# EAGLE board cansat (EAGLE 9.6.2)

Size 100 x 96.19 mm. Coordinates in mm from the lower left corner, seen from the top.
Outline: 0,0 100,0 100,96.19 0,96.19 0,0
Copper layers (1*16): Top 0.035mm / dielectric 1.5mm / Bottom 0.035mm
Design rules "default": minimum track width 6mil, minimum drill 0.35mm, track to track 6mil, track to pad 6mil, pad to pad 6mil, via to via 6mil, smd to smd 6mil, copper to edge 40mil, drill to drill 6mil, minimum pad ring 10mil, minimum via ring 8mil, stop-mask expansion 4mil, vias tented up to drill 0mil, thermal gap 10mil
Net classes: 1 esp: width 0.254 mm, drill 0.127 mm, clearance 0.025 mm; 2 GND_+12V: width 0.305 mm

## Footprints (pad centres in the part's own frame; a part is rotated, then mirrored left to right if it is on the bottom)
AZ1117CH-3.3TRG1 = smd 1.2 x 2.2: 1 -2.3,-6.2; 2 0,-6.2; 3 2.3,-6.2 | smd 3.5 x 2.2: VOUT 0,0
3362P = drill 0.7 pad 1.27 square: CCW -2.54,2.54; CW 2.54,2.54; WIPER 0,0
BMX055 = drill 0.65 pad 1.5 square: 3V3 8.81,-9.53; GND 1.19,-4.46; SCL 1.19,-9.53; SDA 1.19,-7; VCC 8.81,-4.46; VCCIO 8.81,-7
E2,5-7 = drill 0.813 pad 1.6: + -1.27,0 | drill 0.813 pad 1.6 octagon: - 1.27,0
E5-10,5 = drill 1.016 pad 2.54: + -2.54,0 | drill 1.016 pad 2.54 octagon: - 2.54,0
C0603 = smd 1.1 x 1: 1 -0.85,0; 2 0.85,0
C0402 = smd 0.7 x 0.9: 1 -0.65,0; 2 0.65,0
2.5_MINI-SPOX_3PIN = drill 1 square: 1 -1.27,0; 2 1.27,0; 3 3.81,0
2.5_MINI-SPOX_4PIN = drill 1 square: P$1 -1.27,0; P$2 6.35,0; P$3 1.27,0; P$4 3.81,0
3.3V0.5A_M78AR05-0.5 = drill 0.75 pad 1.27 square: GND 0,0; VIN 2.54,0; VOUT -2.54,0
TS-06104 = smd 1 x 1.8: A -2.25,4.1; B -2.25,-4.1; C 2.25,4.1; D 2.25,-4.1
ESP32-WROOM-32D = smd 2 x 0.9: 1_GND -7.5,7.62; 2_3V3 -7.5,6.35; 3_EN -7.5,5.08; 4_SENSOR_VP -7.5,3.81; 5_SENSOR_VN -7.5,2.54; 6_IO34 -7.5,1.27; 7_IO35 -7.5,0; 8_IO32 -7.5,-1.27; 9_IO33 -7.5,-2.54; 10_IO25 -7.5,-3.81; 11_IO26 -7.5,-5.08; 12_IO27 -7.5,-6.35; 13_IO14 -7.5,-7.62; 14_IO12 -7.5,-8.89; 25_IO0 9.5,-8.89; 26_IO4 9.5,-7.62; 27_IO16 9.5,-6.35; 28_IO17 9.5,-5.08; 29_IO5 9.5,-3.81; 30_IO18 9.5,-2.54; 31_IO19 9.5,-1.27; 32_NC 9.5,0; 33_IO21 9.5,1.27; 34_RXD0 9.5,2.54; 35_TXD0 9.5,3.81; 36_IO22 9.5,5.08; 37_IO23 9.5,6.35; 38_GND 9.5,7.62 | smd 0.9 x 2: 15_GND -4.715,-10.1; 16_IO13 -3.445,-10.1; 17_SD2 -2.175,-10.1; 18_SD3 -0.905,-10.1; 19_CMD 0.365,-10.1; 20_CLK 1.635,-10.1; 21_SD0 2.905,-10.1; 22_SD1 4.175,-10.1; 23_IO15 5.445,-10.1; 24_IO2 6.715,-10.1 | smd 1.33 x 1.33: GND@1 -1.8,1.835; GND@2 0,1.835; GND@3 1.835,1.835; GND@4 -1.8,0; GND@5 0,0; GND@6 1.835,0; GND@7 -1.8,-1.835; GND@8 0,-1.835; GND@9 1.835,-1.835
OSXX1608C1A = smd 0.8 x 0.8: AN -0.75,0; CT 0.75,0
AE-GYSFDMAXB = drill 0.8 long: P1 13.716,5.08; P2 13.716,2.54; P3 13.716,0; P4 13.716,-2.54; P5 13.716,-5.08 | hole 3.2: -12,12; 12,12; 12,-12; -12,-12
IM920C = smd 0.3 x 1.1: $P1 -1.75,-13.45; $P2 -1.75,-9.55; $P3 -2.25,-13.45; $P4 -2.25,-9.55; $P5 -2.75,-13.45; $P6 -2.75,-9.55; $P7 -3.25,-13.45; $P8 -3.25,-9.55; $P9 -3.75,-13.45; $P10 -3.75,-9.55; $P11 -4.25,-13.45; $P12 -4.25,-9.55; $P13 -4.75,-13.45; $P14 -4.75,-9.55; $P15 -5.25,-13.45; $P16 -5.25,-9.55; $P17 -5.75,-13.45; $P18 -5.75,-9.55; $P19 -6.25,-13.45; $P20 -6.25,-9.55 | hole 2.5: 7,-12 | hole 2: -7,14
BD6231F = smd 3.81 x 0.635: FIN -2.54,-1.905; GND 2.54,1.905; OUT1 -2.54,1.905; OUT2 2.54,0.635; RIN 2.54,-1.905; VCC1 -2.54,0.635; VCC2 -2.54,-0.635; VREF 2.54,-0.635
19_2.54 = drill 0.6 pad 1.27 square: P$1 0,12.7; P$2 0,10.16; P$3 0,7.62; P$4 0,5.08; P$5 0,2.54; P$6 0,0; P$7 0,-2.54; P$8 0,-5.08; P$9 0,-7.62; P$10 0,-10.16; P$11 0,-12.7; P$12 0,-15.24; P$13 0,-17.78; P$14 0,-20.32; P$15 0,-22.86; P$16 0,-25.4; P$17 0,-27.94; P$18 0,-30.48; P$19 0,-33.02
R0603 = smd 1 x 1.1: 1 -0.85,0; 2 0.85,0
R0201 = smd 0.28 x 0.43: 1 -0.255,0; 2 0.255,0
0207/10 = drill 0.813 octagon: 1 -5.08,0; 2 5.08,0
RASPBERRYPI4B = drill 0.6 square: 3V3_1 -2.54,-2.54; 3V3_2 -2.54,-22.86; 5V_1 0,-2.54; 5V_2 0,-5.08; GND_1 0,-7.62; GND_2 0,-17.78; GND_3 0,-25.4; GND_4 0,-38.1; GND_5 0,-43.18; GND_6 -2.54,-12.7; GND_7 -2.54,-33.02; GND_8 -2.54,-50.8; GPIO0 -2.54,-35.56; GPIO1 0,-35.56; GPIO2 -2.54,-5.08; GPIO3 -2.54,-7.62; GPIO4 -2.54,-10.16; GPIO5 -2.54,-38.1; GPIO6 -2.54,-40.64; GPIO7 0,-33.02; GPIO8 0,-30.48; GPIO9 -2.54,-27.94; GPIO10 -2.54,-25.4; GPIO11 -2.54,-30.48; GPIO12 0,-40.64; GPIO13 -2.54,-43.18; GPIO14 0,-10.16; GPIO15 0,-12.7; GPIO16 0,-45.72; GPIO17 -2.54,-15.24; GPIO18 0,-15.24; GPIO19 -2.54,-45.72; GPIO20 0,-48.26; GPIO21 0,-50.8; GPIO22 -2.54,-20.32; GPIO23 0,-20.32; GPIO24 0,-22.86; GPIO25 0,-27.94; GPIO26 -2.54,-48.26; GPIO27 -2.54,-17.78
SRIDE_SWITCH = drill 1: L -2.5,0; LR 0,0; R 2.5,0
NPN_SS8050-G = smd 0.6 x 0.8: 1 -0.95,-2.02; 2 0.95,-2.02; 3 0,0
TERMINAL_SLOPED_2PIN = drill 1.2 square: 1 -2.54,0; 2 2.54,0
ESD5484FCT5G = smd 0.28 x 0.3: 1_CT -0.235,0; 2_AN 0.235,0
QFN50P500X500X80-29N = smd 1.01 x 0.27: 1 -2.36,1.5; 2 -2.36,1; 3 -2.36,0.5; 4 -2.36,0; 5 -2.36,-0.5; 6 -2.36,-1; 7 -2.36,-1.5; 15 2.36,-1.5; 16 2.36,-1; 17 2.36,-0.5; 18 2.36,0; 19 2.36,0.5; 20 2.36,1; 21 2.36,1.5 | smd 0.27 x 1.01: 8 -1.5,-2.36; 9 -1,-2.36; 10 -0.5,-2.36; 11 0,-2.36; 12 0.5,-2.36; 13 1,-2.36; 14 1.5,-2.36; 22 1.5,2.36; 23 1,2.36; 24 0.5,2.36; 25 0,2.36; 26 -0.5,2.36; 27 -1,2.36; 28 -1.5,2.36 | smd 3.25 x 3.25: 29 0,0
2SJ681 = drill 0.7: DRAIN 0,0; GATE 2.54,0; SOURCE -2.54,0
5V3A_KIC-053 = drill 0.7 pad 1.27 square: GND1 11.01,0; GND2 8.47,0; VADJ -14.39,0; VIN1 16.09,0; VIN2 13.55,0; VOUT1 -9.31,0; VOUT2 -11.85,0
GY-BMP280-FOOTPRINT = drill 0.6: CSB 11.43,0; GND 3.81,0; SCK 6.35,0; SDI 8.89,0; SDO 13.97,0; VCC 1.27,0 | hole 0.35: 1.27,7.62; 13.97,7.62
MICRO-B_ZX62R-B-5P = smd 0.4 x 1.35: 1 1.3,0; 2 0.65,0; 3 0,0; 4 -0.65,0; 5 -1.3,0 | smd 2.1 x 2: P$6 3.1,-0.325; P$7 -3.1,-0.325 | smd 1.6 x 1.9: P$8 -4.1,-2.675; P$9 4.1,-2.675 | smd 1.2 x 1.9: P$10 0.85,-2.675; P$11 -0.9,-2.675

## Placement (x,y rotation side)
3-REG2  [AZ1117CH-3.3TRG1]  82.93,17.02 90 top
100KR1  100kR  [3362P]  43.81,59.56 90 top
BMX1  BMX055  [BMX055]  2.03,75.31 0 top
C1  4.7uF  [E2,5-7]  42.93,41.27 0 top
C2  1000uF  [E5-10,5]  49.66,87.76 90 top
C3  1000uF  [E5-10,5]  60.71,87.63 90 top
C5  1000uF  [E5-10,5]  69.22,47.5 270 top
C6  4.7uF  [E2,5-7]  50.04,41.4 180 top
C7  100uf  [E2,5-7]  73.03,37.21 90 top
C8  0.1uf  [E2,5-7]  81.92,37.21 90 top
C9  0.1uF  [E2,5-7]  70.48,88.01 90 top
C12  22uf  [C0603]  91.95,17.02 0 top
C13  22uf  [C0603]  91.95,19.3 0 top
C14  0.1uF  [C0603]  83.06,4.06 270 top
C15  0.1uF  [C0603]  83.06,11.68 270 top
C16  4.7uF  [C0402]  97.92,5.84 90 top
C17  0.1uF  [C0603]  95.63,5.84 90 top
C18  0.1uF  [C0603]  48.13,23.5 90 top
C19  22uF  [C0603]  50.8,23.5 90 top
C20  0.1uF  [C0603]  45.47,23.5 90 top
C21  4.7uF  [E2,5-7]  50.16,34.29 180 top
C22  4.7uF  [E2,5-7]  42.93,34.29 0 top
C23  0.1uF  [E5-10,5]  58.42,47.5 270 top
CON2  [2.5_MINI-SPOX_3PIN]  25.78,9.78 0 top
CON3  [2.5_MINI-SPOX_3PIN]  25.78,3.81 0 top
CON4  [2.5_MINI-SPOX_4PIN]  36.45,3.81 0 top
CON5  [2.5_MINI-SPOX_4PIN]  36.45,9.78 0 top
DCDC1  5-3.3  [3.3V0.5A_M78AR05-0.5]  46.1,46.99 180 top
EN1  TS-06104  [TS-06104]  78.49,11.68 90 top
ESP32_WROOM32D  ESP32-WROOM-32D  [ESP32-WROOM-32D]  60.58,16.26 0 top
ESP_LED1  OSXX1608C1A  [OSXX1608C1A]  29.46,20.32 0 top
ESP_LED2  OSXX1608C1A  [OSXX1608C1A]  29.46,16.51 0 top
GPS  AE-GYSFDMAXB  [AE-GYSFDMAXB]  28.32,78.74 270 top
IM  IM920C  [IM920C]  26.67,46.99 0 top
IMCHECK  OSXX1608C1A  [OSXX1608C1A]  17.53,30.48 180 top
IO1  TS-06104  [TS-06104]  78.49,4.06 90 top
L2  OSXX1608C1A  [OSXX1608C1A]  93.34,20.95 0 top
MD_L  [BD6231F]  79.38,28.32 270 top
MD_R  [BD6231F]  79.38,48.64 270 top
PIN_L  19_2.54  [19_2.54]  13.59,35.31 0 top
PIN_R  19_2.54  [19_2.54]  11.05,35.31 0 top
R1  150R  [R0603]  26.67,20.32 0 top
R2  150R  [R0603]  26.67,16.51 0 top
R3  150R  [R0603]  20.32,30.48 180 top
R4  150R  [R0603]  20.32,22.86 0 top
R5  150R  [R0603]  20.32,19.05 0 top
R6  150R  [R0603]  20.32,15.24 0 top
R7  2.2kR  [R0603]  40.77,13.46 270 top
R8  2.2kR  [R0603]  36.96,13.46 270 top
R9  3.3kR  [R0603]  39.88,16.51 0 top
R10  3.3kR  [R0603]  36.07,16.51 0 top
R11  10k  [R0201]  72.01,22.86 90 top
R12  [0207/10]  92.08,70.23 180 top
R14  2k  [R0201]  91.44,20.95 180 top
R15  10k  [R0201]  87.12,4.06 90 top
R16  10k  [R0201]  87,8.13 90 top
R17  2k  [R0201]  92.08,9.65 270 top
R18  10k  [R0201]  91.06,9.65 90 top
R19  22k  [R0201]  93.85,9.4 180 top
R20  47k  [R0201]  92.84,9.65 270 top
R21  10k  [R0201]  46.86,21.59 0 top
RAS_LED1  OSXX1608C1A  [OSXX1608C1A]  23.11,22.86 0 top
RAS_LED2  OSXX1608C1A  [OSXX1608C1A]  23.11,19.05 0 top
RAS_LED3  OSXX1608C1A  [OSXX1608C1A]  23.11,15.24 0 top
RASPBERRYPI_4B  [RASPBERRYPI4B]  6.1,53.85 0 top
SW1  [SRIDE_SWITCH]  97.16,77.85 90 top
T3  [NPN_SS8050-G]  84.96,10.16 90 top
T4  [NPN_SS8050-G]  84.96,5.97 90 top
TM1  [TERMINAL_SLOPED_2PIN]  93.34,46.1 270 top
TM2  [TERMINAL_SLOPED_2PIN]  93.34,33.4 270 top
TM3  [TERMINAL_SLOPED_2PIN]  93.34,89.28 0 top
TVC4  [ESD5484FCT5G]  91.31,12.19 90 top
TVC5  [ESD5484FCT5G]  92.33,12.19 90 top
TVC6  [ESD5484FCT5G]  93.34,12.19 90 top
U2  CP2102N-A01-GQFN28  [QFN50P500X500X80-29N]  91.06,5.84 180 top
U$7  2SJ681-PCH  [2SJ681]  89.53,81.66 0 top
U$8  5V3A_KIC-053  [5V3A_KIC-053]  65.41,62.61 0 top
U$9  GY-BPM280  [GY-BMP280-FOOTPRINT]  3.3,93.09 270 top
U$10  2SJ681-PCH  [2SJ681]  89.53,77.85 0 top
USB2  [MICRO-B_ZX62R-B-5P]  95.63,13.21 90 top

## Library data of the parts
3-REG2 = Chip 3-Terminal Regulator
100KR1 = TRIM_register
BMX1 = BMX055
C1-C3 C5-C9 C12-C23 = rcl; SPICEPREFIX: C
CON2-CON5 = Connector
DCDC1 U$8 = DC-DC
EN1 IO1 SW1 = Switches
ESP32_WROOM32D = ESP32
ESP_LED1 ESP_LED2 IMCHECK L2 RAS_LED1-RAS_LED3 = ChipLED
GPS = AE-GYSFDMAXB
IM = IM920
MD_L MD_R = Motor Driver
PIN_L PIN_R = JumperPins
R1-R12 R14-R21 = rcl; SPICEPREFIX: R
RASPBERRYPI_4B = RASPBERRYPI4B
T3 T4 = ChipTransister
TM1-TM3 = TerminalBrock
TVC4-TVC6 = TVC Diode
U2 = CP2102N-A01-GQFN28; AVAILABILITY: In Stock; DESCRIPTION: USB Bridge, USB to UART USB 2.0 UART Interface 28-QFN (5x5); MF: Silicon Labs; MP: CP2102N-A01-GQFN28; PACKAGE: QFN-28 Silicon Labs; PRICE: None; PURCHASE-URL: https://pricing.snapeda.com/search/part/CP2102N-A01-GQFN28/?ref=eda
U$7 U$10 = mosfet
U$9 = BMP280
USB2 = USB

## Nets
3V3: BMX1.3V3
+3V3: 3-REG2.2 3-REG2.VOUT C6.+ C12.1 C16.1 C17.1 C18.1 C19.1 DCDC1.VOUT ESP32_WROOM32D.2_3V3 IM.$P17 PIN_L.P$1 R11.2 R17.1 R21.2 U2.6 U2.7 U$9.CSB U$9.VCC
+5V: 3-REG2.3 100KR1.CCW BMX1.VCC C5.+ C13.1 C21.+ C22.+ C23.+ CON2.2 CON3.2 CON4.P$2 CON5.P$2 DCDC1.VIN GPS.P1 PIN_L.P$19 R14.2 R19.1 RASPBERRYPI_4B.5V_1 TVC4.2_AN U$8.VOUT1 U$8.VOUT2 USB2.1
+5V2: C1.+
+12V: C2.+ C3.+ C7.+ C8.+ C9.+ MD_L.VCC1 MD_L.VCC2 MD_L.VREF MD_R.VCC1 MD_R.VCC2 MD_R.VREF U$8.VIN1 U$8.VIN2 U$10.DRAIN
+D: TVC6.2_AN U2.4 USB2.3
-D: TVC5.2_AN U2.5 USB2.2
A7_1: R12.2 U$7.SOURCE U$10.SOURCE
AS_SCL: CON4.P$4 CON5.P$4 PIN_R.P$3 R7.2
AS_SDA: CON4.P$3 CON5.P$3 PIN_R.P$6 R8.2
BB_SCL: BMX1.SCL RASPBERRYPI_4B.GPIO3 U$9.SCK
BB_SDA: BMX1.SDA RASPBERRYPI_4B.GPIO2 U$9.SDI
CLK: ESP32_WROOM32D.20_CLK PIN_R.P$19
CMD: ESP32_WROOM32D.19_CMD PIN_L.P$18
CP_RX: ESP32_WROOM32D.35_TXD0 PIN_R.P$4 U2.25
CP_TX: ESP32_WROOM32D.34_RXD0 PIN_R.P$5 U2.26
CPVBUS: R19.2 R20.2 U2.8
DTR: R16.1 T4.2 U2.28
EN: C15.1 C20.1 EN1.D ESP32_WROOM32D.3_EN PIN_L.P$2 R21.1 T3.3
GND [GND_+12V]: 3-REG2.1 100KR1.CW BMX1.GND C2.- C3.- C5.- C7.- C8.- C9.- C12.2 C13.2 C14.2 C15.2 C16.2 C17.2 C18.2 C19.2 C20.2 C23.- CON2.1 CON3.1 CON4.P$1 CON5.P$1 EN1.B ESP32_WROOM32D.1_GND ESP32_WROOM32D.15_GND ESP32_WROOM32D.32_NC ESP32_WROOM32D.38_GND ESP32_WROOM32D.GND@1 ESP32_WROOM32D.GND@2 ESP32_WROOM32D.GND@3 ESP32_WROOM32D.GND@4 ESP32_WROOM32D.GND@5 ESP32_WROOM32D.GND@6 ESP32_WROOM32D.GND@7 ESP32_WROOM32D.GND@8 ESP32_WROOM32D.GND@9 ESP_LED1.CT ESP_LED2.CT GPS.P2 IM.$P18 IMCHECK.CT IO1.B L2.CT MD_L.GND MD_R.GND PIN_L.P$14 PIN_R.P$1 PIN_R.P$7 R9.1 R10.1 R18.2 R20.1 RAS_LED1.CT RAS_LED2.CT RAS_LED3.CT RASPBERRYPI_4B.GND_1 RASPBERRYPI_4B.GND_2 RASPBERRYPI_4B.GND_3 RASPBERRYPI_4B.GND_4 RASPBERRYPI_4B.GND_5 RASPBERRYPI_4B.GND_6 RASPBERRYPI_4B.GND_7 RASPBERRYPI_4B.GND_8 SW1.LR TM3.2 TVC4.1_CT TVC5.1_CT TVC6.1_CT U2.3 U2.29 U$7.GATE U$8.GND1 U$8.GND2 U$9.GND U$9.SDO USB2.5
GND2 [GND_+12V]: C1.- C6.- C21.- C22.- DCDC1.GND
GPS_RX: GPS.P3 RASPBERRYPI_4B.GPIO14
GPS_TX: GPS.P4 RASPBERRYPI_4B.GPIO15
IM_BUSY: ESP32_WROOM32D.13_IO14 IM.$P1 PIN_L.P$12
IM_RESET: ESP32_WROOM32D.14_IO12 IM.$P19 PIN_L.P$13
IM_RX: ESP32_WROOM32D.28_IO17 IM.$P6 PIN_R.P$11
IM_TX: ESP32_WROOM32D.27_IO16 IM.$P7 PIN_R.P$12
IO5: ESP32_WROOM32D.29_IO5 PIN_R.P$10
IO13: ESP32_WROOM32D.16_IO13 PIN_L.P$15
IO27: ESP32_WROOM32D.12_IO27 PIN_L.P$11
LED1: ESP32_WROOM32D.6_IO34 PIN_L.P$5 R1.1
LED2: ESP32_WROOM32D.7_IO35 PIN_L.P$6 R2.1
LED3: IM.$P15 R3.1
LED4: R4.1 RASPBERRYPI_4B.GPIO17
LED5: R5.1 RASPBERRYPI_4B.GPIO27
LED6: R6.1 RASPBERRYPI_4B.GPIO22
MD_LB: ESP32_WROOM32D.11_IO26 MD_L.RIN PIN_L.P$10
MD_LF: ESP32_WROOM32D.10_IO25 MD_L.FIN PIN_L.P$9
MD_RB: C14.1 ESP32_WROOM32D.25_IO0 IO1.D MD_R.RIN PIN_R.P$14 T4.3
MD_RF: ESP32_WROOM32D.26_IO4 MD_R.FIN PIN_R.P$13
N$1: ESP_LED1.AN R1.2
N$2: ESP_LED2.AN R2.2
N$3: IMCHECK.AN R3.2
N$4: R4.2 RAS_LED1.AN
N$5: R5.2 RAS_LED2.AN
N$6: R6.2 RAS_LED3.AN
N$7: ESP32_WROOM32D.36_IO22 R7.1 R9.2
N$8: ESP32_WROOM32D.33_IO21 R8.1 R10.2
N$9: TM3.1 U$7.DRAIN
N$13: L2.AN R14.1
N$14: R16.2 T3.1
N$15: R15.2 T4.1
N$16: R17.2 U2.9
N$17: R18.1 U2.11
N$18: 100KR1.WIPER U$8.VADJ
N$20: R12.1 SW1.L U$10.GATE
OUT_MD_L1 [GND_+12V]: MD_L.OUT1 TM2.1
OUT_MD_L2 [GND_+12V]: MD_L.OUT2 TM2.2
OUT_MD_R1 [GND_+12V]: MD_R.OUT1 TM1.1
OUT_MD_R2 [GND_+12V]: MD_R.OUT2 TM1.2
RP_MISO: ESP32_WROOM32D.31_IO19 PIN_R.P$8 RASPBERRYPI_4B.GPIO9
RP_MOSI: ESP32_WROOM32D.37_IO23 PIN_R.P$2 R11.1 RASPBERRYPI_4B.GPIO10
RP_RX: ESP32_WROOM32D.24_IO2 PIN_R.P$15 RASPBERRYPI_4B.GPIO1
RP_SCK: ESP32_WROOM32D.30_IO18 PIN_R.P$9 RASPBERRYPI_4B.GPIO11
RP_SS: ESP32_WROOM32D.5_SENSOR_VN PIN_L.P$4 RASPBERRYPI_4B.GPIO8
RP_TX: ESP32_WROOM32D.23_IO15 PIN_R.P$16 RASPBERRYPI_4B.GPIO0
RTS: R15.1 T3.2 U2.24
SD0: ESP32_WROOM32D.21_SD0 PIN_R.P$18
SD1: ESP32_WROOM32D.22_SD1 PIN_R.P$17
SD2: ESP32_WROOM32D.17_SD2 PIN_L.P$16
SD3: ESP32_WROOM32D.18_SD3 PIN_L.P$17
SENSOR_VP: ESP32_WROOM32D.4_SENSOR_VP PIN_L.P$3
SERVO1: CON2.3 ESP32_WROOM32D.8_IO32 PIN_L.P$7
SERVO2: CON3.3 ESP32_WROOM32D.9_IO33 PIN_L.P$8
VCCIO: BMX1.VCCIO

## Tracks (layer width: path | path; a pad name or v marks a point on that pad's centre or on a via)
+3V3  (18 unrouted)
+5V  (21 unrouted)
+12V  (13 unrouted)
+D  (2 unrouted)
-D  (2 unrouted)
A7_1  (2 unrouted)
AS_SCL  (3 unrouted)
AS_SDA  (3 unrouted)
BB_SCL  (2 unrouted)
BB_SDA  (2 unrouted)
CLK  (1 unrouted)
CMD  (1 unrouted)
CP_RX  (2 unrouted)
CP_TX  (2 unrouted)
CPVBUS  (2 unrouted)
DTR  (2 unrouted)
EN  (6 unrouted)
GND  (76 unrouted)
GND2  (4 unrouted)
GPS_RX  (1 unrouted)
GPS_TX  (1 unrouted)
IM_BUSY  (2 unrouted)
IM_RESET  (2 unrouted)
IM_RX  (2 unrouted)
IM_TX  (2 unrouted)
IO5  (1 unrouted)
IO13  (1 unrouted)
IO27  (1 unrouted)
LED1  (2 unrouted)
LED2  (2 unrouted)
LED3  (1 unrouted)
LED4  (1 unrouted)
LED5  (1 unrouted)
LED6  (1 unrouted)
MD_LB  (2 unrouted)
MD_LF  (2 unrouted)
MD_RB  (5 unrouted)
MD_RF  (2 unrouted)
N$1  (1 unrouted)
N$2  (1 unrouted)
N$3  (1 unrouted)
N$4  (1 unrouted)
N$5  (1 unrouted)
N$6  (1 unrouted)
N$7  (2 unrouted)
N$8  (2 unrouted)
N$9  (1 unrouted)
N$13  (1 unrouted)
N$14  (1 unrouted)
N$15  (1 unrouted)
N$16  (1 unrouted)
N$17  (1 unrouted)
N$18  (1 unrouted)
N$20  (2 unrouted)
OUT_MD_L1  (1 unrouted)
OUT_MD_L2  (1 unrouted)
OUT_MD_R1  (1 unrouted)
OUT_MD_R2  (1 unrouted)
RP_MISO  (2 unrouted)
RP_MOSI  (3 unrouted)
RP_RX  (2 unrouted)
RP_SCK  (2 unrouted)
RP_SS  (2 unrouted)
RP_TX  (2 unrouted)
RTS  (2 unrouted)
SD0  (1 unrouted)
SD1  (1 unrouted)
SD2  (1 unrouted)
SD3  (1 unrouted)
SENSOR_VP  (1 unrouted)
SERVO1  (2 unrouted)
SERVO2  (2 unrouted)

## Text on the board
tPlace: BMP280 | 3V3 | 5V | IO2 | 5V | IO3 | GND | IO4 | IO14 | GND | IO15 | IO17 | IO18 | IO27 | GND | IO22 | IO23 | 3V3 | IO24 | IO10 | GND | IO9 | IO25 | IO11 | IO8 | GND | IO7 | IO0 | IO1 | IO5 | GND | IO6 | IO12 | IO13 | GND | IO19 | IO16 | IO26 | IO20 | GND | IO21